# Altium PCB PCB1.PcbDoc
Units mil, origin at the board's own origin, x right, y up, seen from the top; angles counter-clockwise.
Board outline 2041 x 1623 mil, 2 copper layers (Top Layer, Bottom Layer); 3 components, 7 nets, 22 pads, 2 vias.
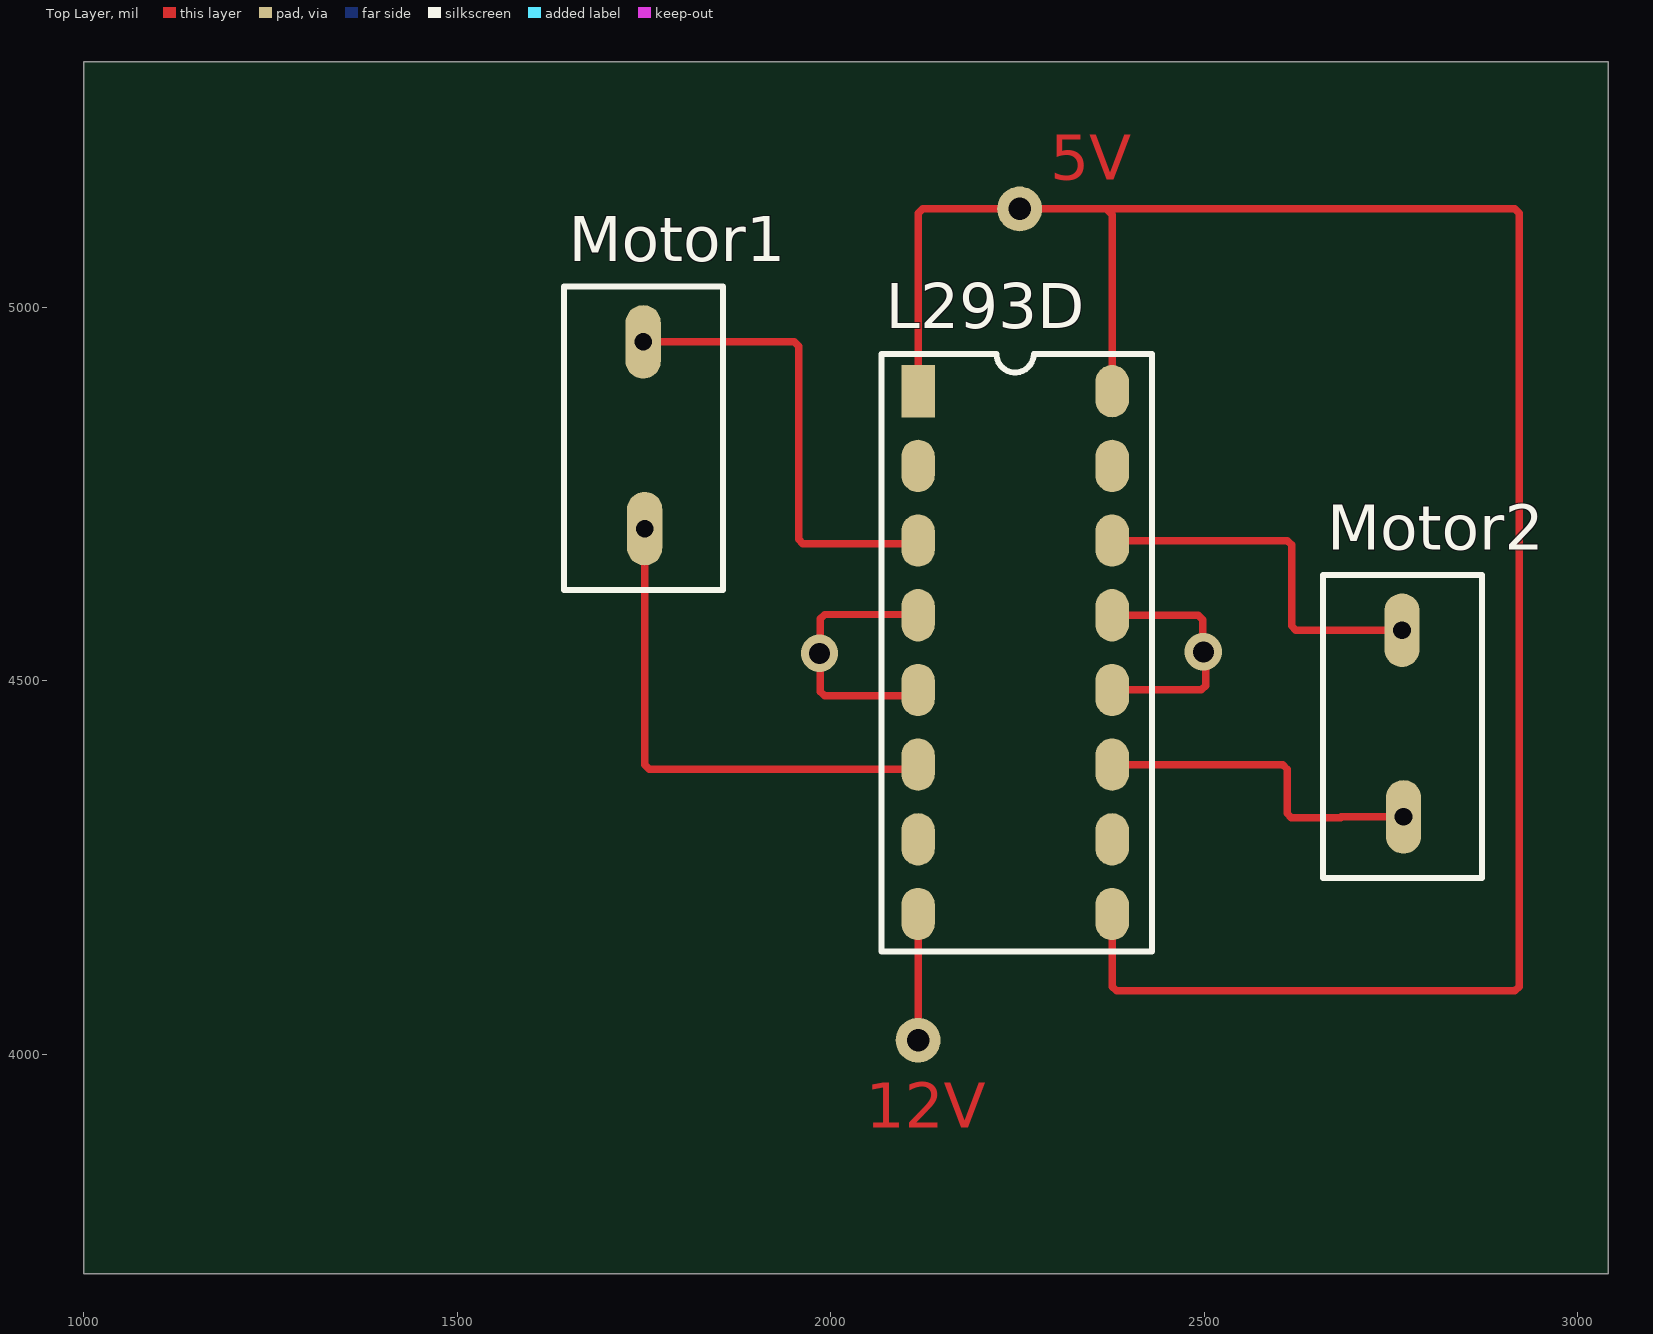
[diagram p0: Top Layer view]
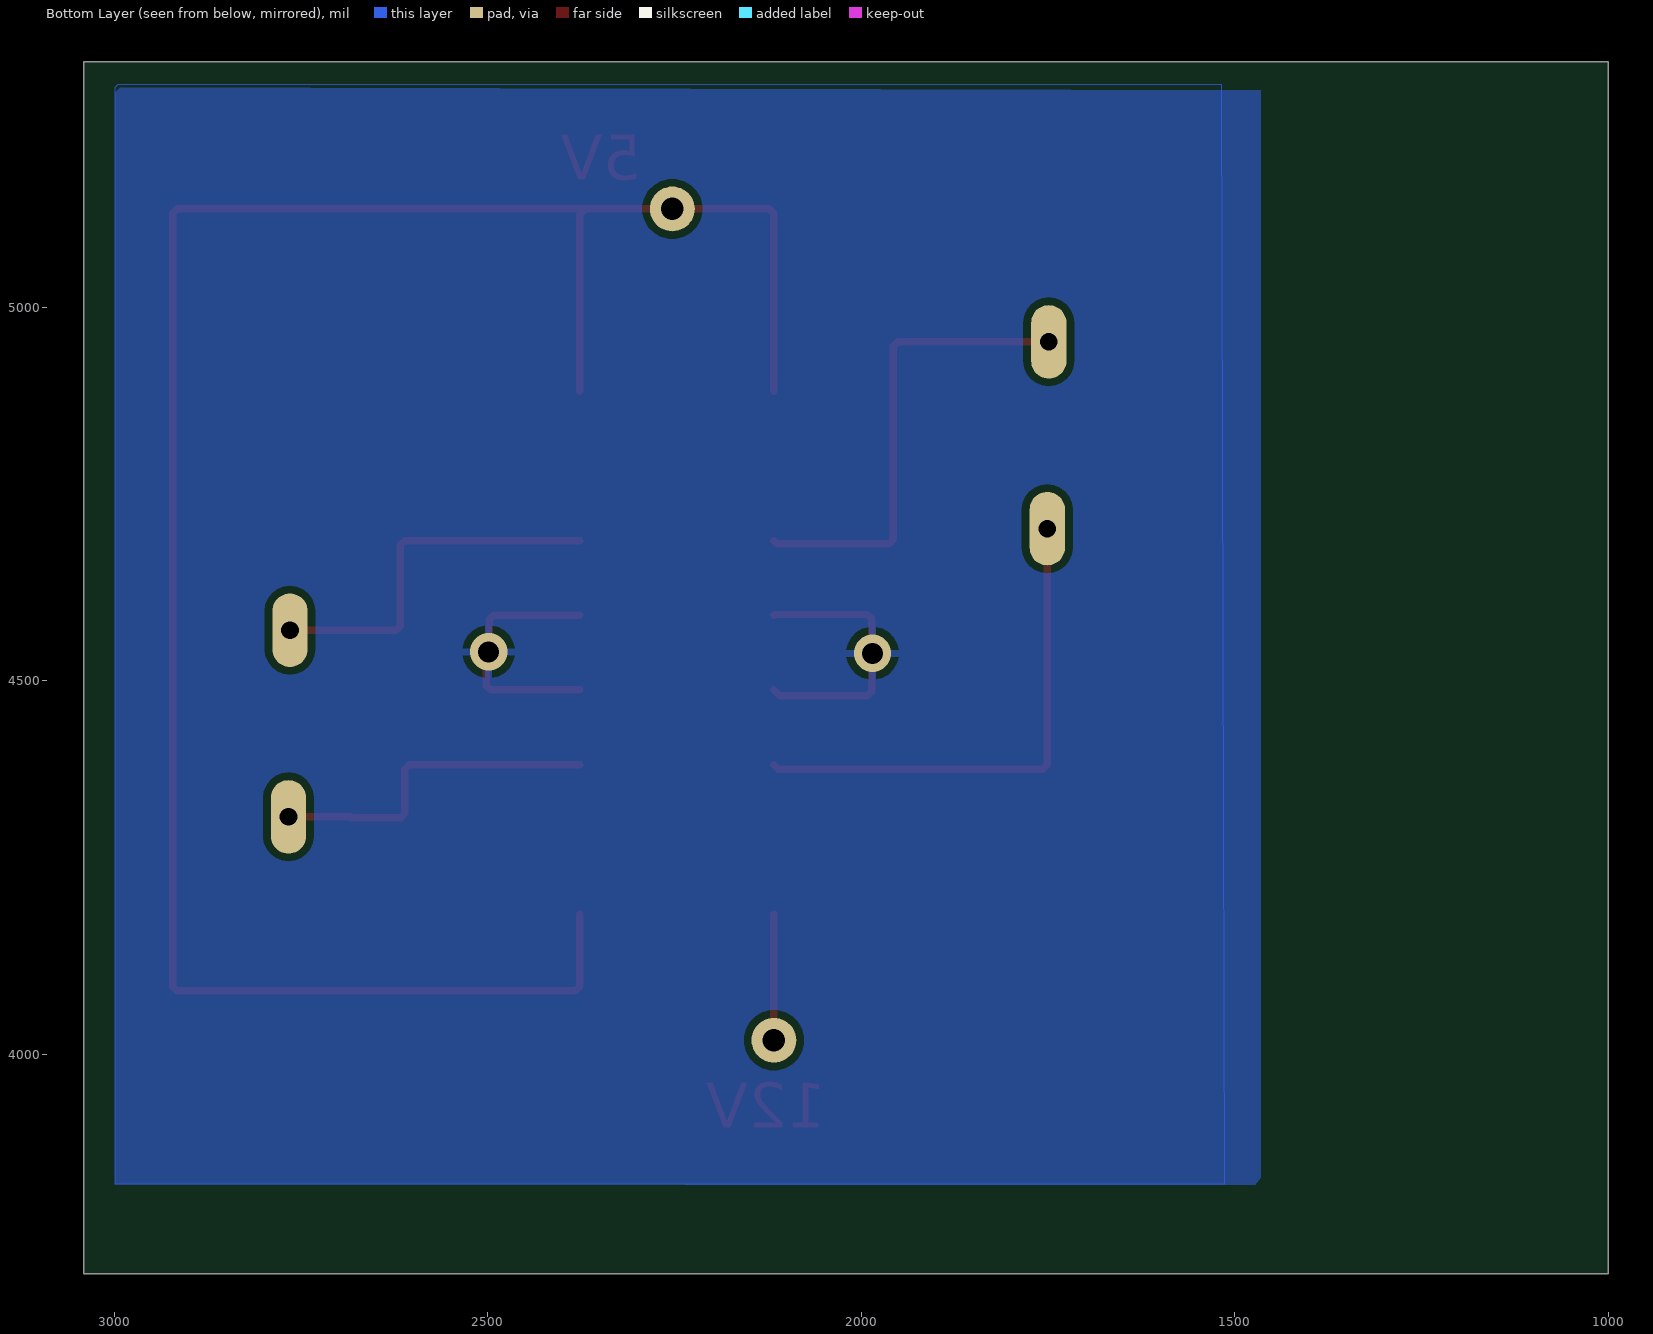
[diagram p1: Bottom Layer view, seen from below]

## Layer stack, top to bottom
Top Solder: solder mask 0.4, Solder Resist, Dk 3.5
Top Layer: signal copper 1.4
Dielectric 1: dielectric 12.6, FR-4, Dk 4.8
Bottom Layer: signal copper 1.4
Bottom Solder: solder mask 0.4, Solder Resist, Dk 3.5

## Board outline
1000,3706 3041,3706 3041,5329 1000,5329

## Design rules (kind name [scope] priority, off if disabled: settings)
Clearance [All] p1: gap=10 ignorepadtopadclearanceinfootprint=FALSE
PolygonConnect [All] p1: connectstyle=Relief reliefconductorwidth=10 reliefentries=4 polygonreliefangle="90 Angle" airgapwidth=10
RoutingVias [All] p1: holewidth=28 width=50 viastyle="Through Hole" minholewidth=28 minwidth=50 maxholewidth=28 maxwidth=50
SolderMaskExpansion [All] p1: expansion=4 istentingtop=FALSE
SupplyNets "Schematic Supply Nets_2" [InNet('+12')] p1: voltage=0.000
SupplyNets "Schematic Supply Nets_1" [InNet('+5')] p2: voltage=0.000
SupplyNets "Schematic Supply Nets" [InNet('GND')] p3: voltage=0.000
Width [All] p1: maxlimit=10 minlimit=10 preferedwidth=10
30 further rules are at their usual default settings.

## Components (designator, comment, footprint, x,y, rotation, side; value= is the part's Value field where it differs from the comment)
L293D "L293D" L293D 2117,4888 r0 top (schematic designator *)
Motor1 "Motor2" Motor 1750,4829 r90 top (schematic designator *)
Motor2 "Motor" Motor 2766,4443 r90 top (schematic designator *)

## Footprints (in the part's own frame and the unit in brackets; to place one, negate y for a bottom-side part, rotate by r counter-clockwise, add the part's x,y. Pads: shape width x height; smd on the part's side, far side on the other; paste and mask are expansions set on the pad)
L293D [mm]
  rect 1.14x1.78 smd: 1(0,0)
  oval 1.14x1.78 smd: 2(0,-2.54) 3(0,-5.08) 4(0,-7.62) 5(0,-10.16) 6(0,-12.7) 7(0,-15.24) 8(0,-17.78) 9(6.6,-17.78) 10(6.6,-15.24) 11(6.6,-12.7) 12(6.6,-10.16) 13(6.6,-7.62) 14(6.6,-5.08) 15(6.6,-2.54) 16(6.6,0)
  silkscreen extent -1.24,-19.05 7.95,1.27
Motor [mm]
  oval 2.5x1.2 hole 0.6: 1(-3.175,-0.025) 2(3.175,0.025)
  silkscreen extent -5.26,-2.69 5.05,2.72

## Free pads (board coordinates)
  round 60 hole 30: 3(2117,4019) 5(2253,5132)

## Via types
v1: diameter 50, hole 28, Top Layer to Bottom Layer, 2 vias

## Nets (pads, with @x,y where several pads share a name; then routed paths per layer and width w, separated by ;. In a path a pad name is that pad's centre, name@x,y a point inside that pad or via, vN(x,y) a via of type N, cw(c..) or ccw(c..) an arc to the next point about the centre after c; other vN are vias at no path point)
+5: L293D.1 L293D.9 L293D.16 pad.5 | length 2977.5
  Top Layer w10: L293D.1 2117,5126 2123,5132 pad.5 2369.14,5132 ; L293D.9 2376.84,4090.86 2382.7,4085 2916.14,4085 2922,4090.86 2922,5126.14 2916.14,5132 2369.14,5132 ; L293D.16 2376.84,5124.3 2369.14,5132
+12: L293D.8 pad.3 | length 169
  Top Layer w10: pad.3 L293D.8
GND: L293D.4 L293D.5 L293D.12 L293D.13 | length 709.8
  Top Layer w10: L293D.5 2109,4480 1991.86,4480 1986,4485.86 1986,4536 v1(1985,4537) 1986,4538 1986,4583.14 1991.86,4589 2116,4589 L293D.4 ; L293D.12 2496.14,4488 2502,4493.86 2502,4536 v1(2499,4539) 2498,4540 2498,4582.14 2492.14,4588 L293D.13
Net*_3: L293D.3 Motor1.2 | length 632.8
  Top Layer w10: Motor1.2 1951.14,4954 1957,4948.14 1957,4689.86 1962.86,4684 2113,4684 L293D.3
Net*_6: L293D.6 Motor1.1 | length 687.1
  Top Layer w10: Motor1.1 1751,4387.86 1756.86,4382 2111,4382 L293D.6
Net*_11: L293D.11 Motor2.1 | length 454.5
  Top Layer w10: L293D.11 2605.14,4388 2611,4382.14 2611,4323 2616.86,4317.14 2682.9,4317.14 2683.76,4318 Motor2.1
Net*_14: L293D.14 Motor2.2 | length 501.3
  Top Layer w10: L293D.14 2611.14,4688 2617,4682.14 2617,4573.86 2622.86,4568 Motor2.2
pads on no net: L293D.2 L293D.7 L293D.10 L293D.15

## Polygon pours and split planes (outlines as drawn)
GND on Bottom Layer "GND_L02_P007" (solid, pour order 7): 1460,3825 1465,3830 1465,5291 2999,5295 2999,5275 2999,3826
GND on Bottom Layer "GND_L02_P003" (solid, pour order 3): 1514,3826 2999,3826 2999,5295 2995,5299 1518,5299

## Other copper
Top Layer:
  text "5V" at 2294,5171 h60
  text "12V" at 2047,3902 h60